# Altium PCB sar19-main-board.PcbDoc
Units mm, origin at the board's own origin, x right, y up, seen from the top; angles counter-clockwise.
Board outline 26 x 32 mm, 2 copper layers (Top Layer, Bottom Layer), stack 1.571 mm thick; 56 components, 42 nets, 228 pads, 110 vias.
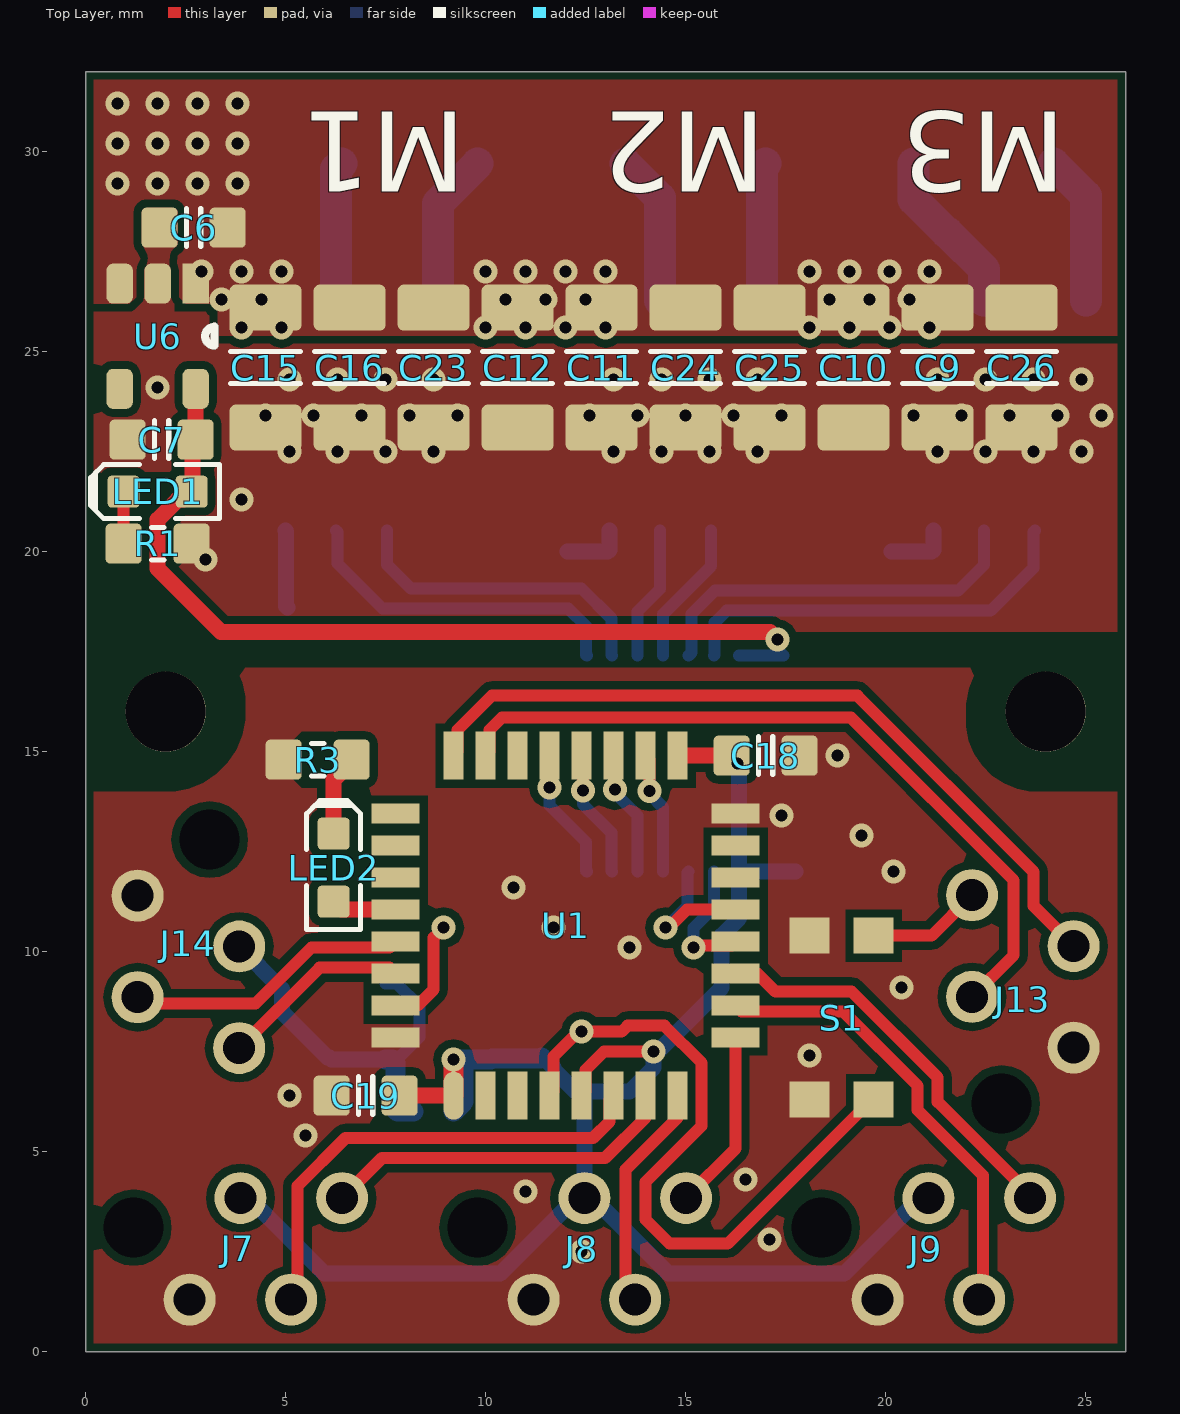
[diagram p0: Top Layer view]
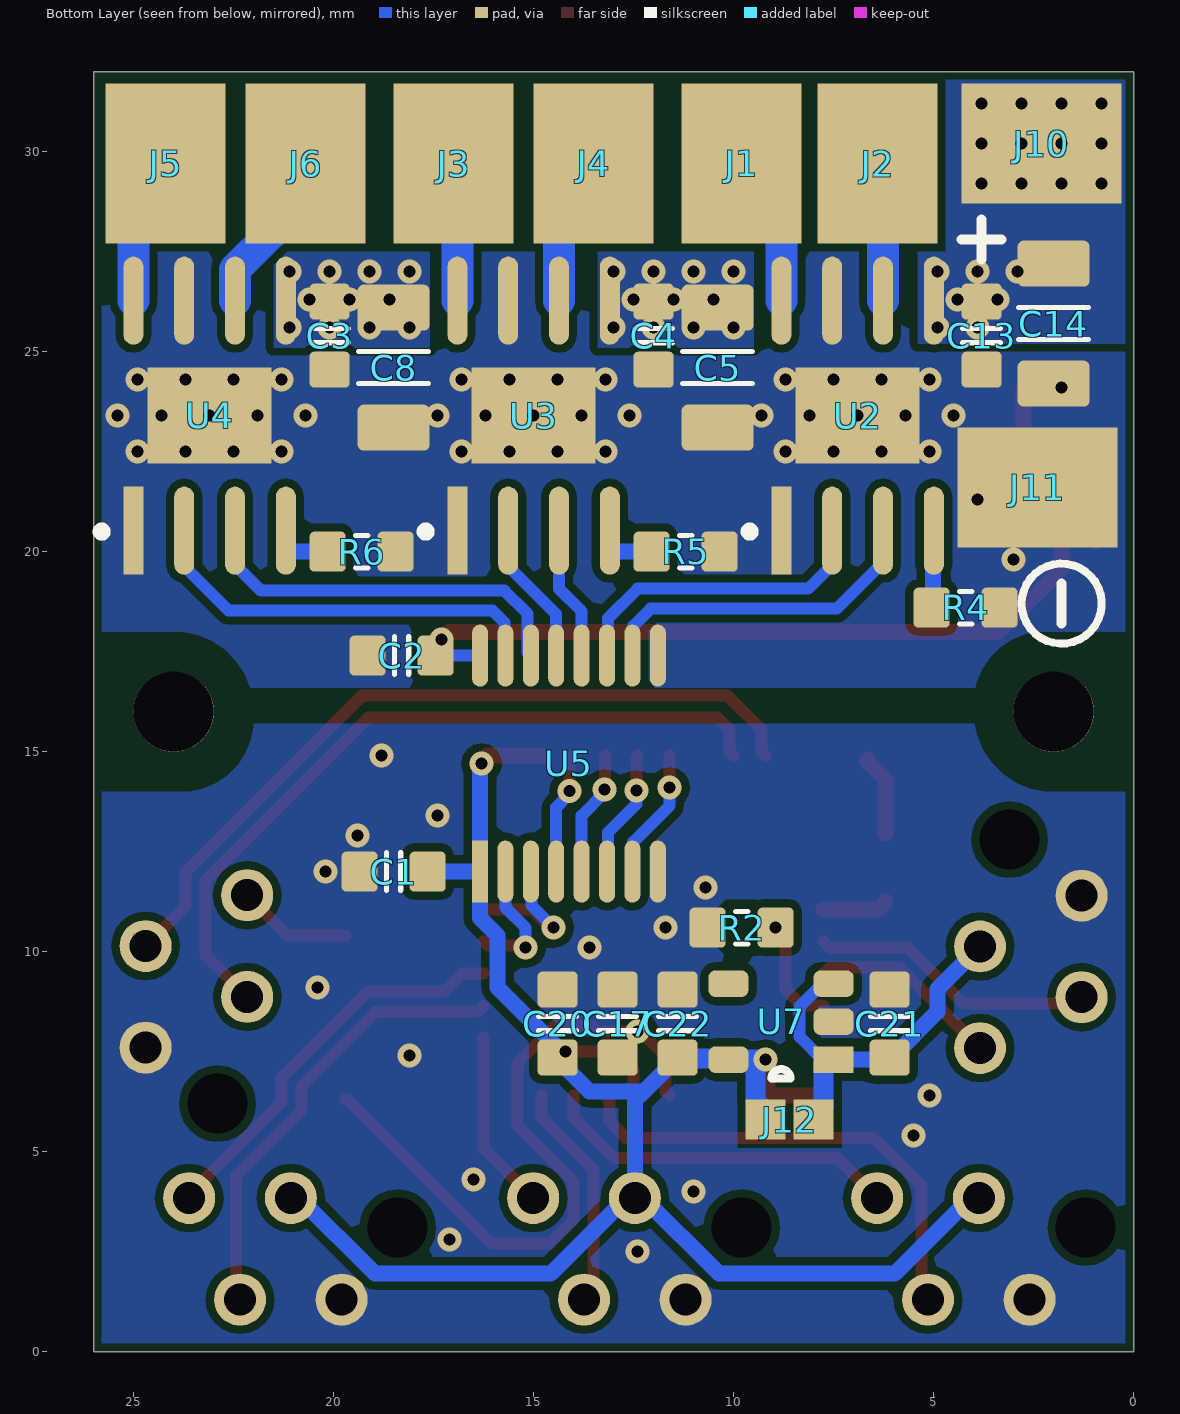
[diagram p1: Bottom Layer view, seen from below]

## Layer stack, top to bottom
Top Solder: solder mask 0.0102, Solder Resist, Dk 3.5
Top Layer: signal copper 0.0356
Dielectric 1: dielectric 1.5, FR-4, Dk 4.8
Bottom Layer: signal copper 0.0356
Bottom Solder: solder mask 0.0102, Solder Resist, Dk 3.5

## Board outline
0,0 26,0 26,32 0,32

## Design rules (kind name [scope] priority, off if disabled: settings)
BoardOutlineClearance [All] p1: gap=0.2 ignorepadtopadclearanceinfootprint=FALSE except(0: Arc-SplitContinuation Track-SplitContinuation SMDPad-SplitContinuation THPad-SplitContinuation Via-SplitContinuation Fill-SplitContinuation Poly-SplitContinuation Region-SplitContinuation Text-SplitContinuation)
Clearance [All] p1: gap=0.2 ignorepadtopadclearanceinfootprint=FALSE except(0: Arc-Hole Track-Hole SMDPad-Hole THPad-Hole Via-Hole Fill-Hole Poly-Hole Region-Hole Text-Hole)
ComponentClearance [All] p1: gap=0.2 collisioncheckmode=3 verticalgap=0.2 showdistances=FALSE
HoleSize [All] p1: absolutevalues=TRUE maxlimit=3 minlimit=0.3 maxpercent=80.000 minpercent=20.000
HoleToHoleClearance [All] p1: gap=0.2 allowstackedmicrovias=TRUE
PolygonConnect [All] p1: connectstyle=Direct reliefconductorwidth=0.254 reliefentries=4 polygonreliefangle="90 Angle" airgapwidth=0.2
RoomDefinition sar19-main-board [InComponentClass('sar19-main-board')] p1: confinementstyle=ConfineIn formatcopy=TRUE lockcomponents=FALSE outline -8.65,-10.5 95.1,-10.5 95.1,84 -8.65,84
RoutingVias [All] p1: holewidth=0.3 width=0.6 viastyle="Through Hole" minholewidth=0.3 minwidth=0.6 maxholewidth=3 maxwidth=5
SilkToSilkClearance [All] p1: silktosilkclearance=0.2
SilkToSolderMaskClearance [IsPad] p1: minsilkscreentomaskgap=0.2 clearancetoexposedcopper=TRUE
SolderMaskExpansion SolderMaskExpansionTentedVia [IsVia] p1: expansion=-5
SolderMaskExpansion [All] p2: expansion=0.1
Width [All] p1: maxlimit=10 minlimit=0.2 preferedwidth=0.3
25 further rules are at their usual default settings.

## Components (designator, comment, footprint, x,y, rotation, side; value= is the part's Value field where it differs from the comment)
C1 "approved sub OK" CAPC1608X90N 18.5,12 r0 bottom value=100n
C2 "approved sub OK" CAPC1608X90N 18.3,17.4 r0 bottom value=100n
C3 "approved sub OK" CAPC1608X90N 20.1,25.4 r270 bottom value=100n
C4 "approved sub OK" CAPC1608X90N 12,25.4 r270 bottom value=100n
C5 "10u" CAPC3216X180N 10.4,24.6 r270 bottom value=10µ
C6 "approved sub OK" CAPC1608X90N 2.7,28.1 r180 top value=1u
C7 "approved sub OK" CAPC1608X90N 1.9,22.8 r180 top value=1u
C8 "10u" CAPC3216X180N 18.5,24.6 r270 bottom value=10µ
C9 "10u" CAPC3216X180N 21.3,24.6 r270 top value=10µ
C10 "10u" CAPC3216X180N 19.2,24.6 r270 top value=10µ
C11 "10u" CAPC3216X180N 12.9,24.6 r270 top value=10µ
C12 "10u" CAPC3216X180N 10.8,24.6 r270 top value=10µ
C13 "approved sub OK" CAPC1608X90N 3.8,25.4 r270 bottom value=100n
C14 "10u" CAPC3216X180N 2,25.7 r270 bottom value=10µ
C15 "10u" CAPC3216X180N 4.5,24.6 r270 top value=10µ
C16 "10u" CAPC3216X180N 6.6,24.6 r270 top value=10µ
C17 "approved sub OK" CAPC1608X90N 12.9,8.2 r270 bottom value=100n
C18 "approved sub OK" CAPC1608X90N 17,14.9 r0 top value=100n
C19 "approved sub OK" CAPC1608X90N 7,6.4 r180 top value=100n
C20 "approved sub OK" CAPC1608X90N 14.4,8.2 r90 bottom value=100n
C21 "approved sub OK" CAPC1608X90N 6.1,8.2 r90 bottom value=1u
C22 "approved sub OK" CAPC1608X90N 11.4,8.2 r90 bottom value=1u
C23 "10u" CAPC3216X180N 8.7,24.6 r270 top value=10µ
C24 "10u" CAPC3216X180N 15,24.6 r270 top value=10µ
C25 "10u" CAPC3216X180N 17.1,24.6 r270 top value=10µ
C26 "10u" CAPC3216X180N 23.4,24.6 r270 top value=10µ
J1 "M1_2" POWER-PAD-4x3 9.8,29.7 r270 bottom
J2 "M1_1" POWER-PAD-4x3 6.4,29.7 r270 bottom
J3 "M2_2" POWER-PAD-4x3 17,29.7 r270 bottom
J4 "M2_1" POWER-PAD-4x3 13.5,29.7 r270 bottom
J5 "M3_2" POWER-PAD-4x3 24.2,29.7 r270 bottom
J6 "M3_1" POWER-PAD-4x3 20.7,29.7 r270 bottom
J7 "ENC1" MICRO-MATCH-FOB-04 2.6,1.3 r180 top
J8 "ENC2" MICRO-MATCH-FOB-04 11.2,1.3 r180 top
J9 "ENC3" MICRO-MATCH-FOB-04 19.8,1.3 r180 top
J10 "BAT+" POWER-PAD-4x3 2.3,30.2 r180 bottom
J11 "BAT-" POWER-PAD-4x3 2.4,21.6 r180 bottom
J12 "JUMPER" JUMPER-SMD-1010 8.6,5.8 r180 bottom
J13 "SWD" MICRO-MATCH-FOB-04 24.7,7.6 r270 top
J14 "UART" MICRO-MATCH-FOB-04 1.3,11.4 r90 top
LED1 "White" LED-0603-GREEN 1.8,21.5 r180 top
LED2 "White" LED-0603-GREEN 6.2,12.1 r90 top
R1 "1k" RESC1608X55N#1 1.8,20.2 r0 top value=1K
R2 "10k" RESC1608X55N#1 9.8,10.6 r0 bottom value=10K
R3 "1k" RESC1608X55N#1 5.8,14.8 r180 top value=1K
R4 "30k" RESC1608X55N#2 4.2,18.6 r180 bottom value=1K
R5 "30k" RESC1608X55N#2 11.2,20 r180 bottom value=1K
R6 "30k" RESC1608X55N#2 19.3,20 r180 bottom value=1K
S1 "PUSHBUTTON" KMR421NGLFS 18.9,8.35 r270 top
U1 "STM32F303K8T6" LQFP32 9.2,6.4 r90 top
U2 "DRV8871" HSOP8 6.9,23.4 r90 bottom
U3 "DRV8871" HSOP8 15,23.4 r90 bottom
U4 "DRV8871" HSOP8 23.1,23.4 r90 bottom
U5 "SI8660" QSOP16 16.34,12 r90 bottom
U6 "MIC5225" SOT23-5 2.75,26.7 r270 top
U7 "MIC5504-3.3" SOT23-5 7.5,7.3 r0 bottom

## Footprints (in the part's own frame and the unit in brackets; to place one, negate y for a bottom-side part, rotate by r counter-clockwise, add the part's x,y. Pads: shape width x height; smd on the part's side, far side on the other; paste and mask are expansions set on the pad)
CAPC1608X90N [mm] "Chip Capacitor, Body 1.6x0.8mm, EIA 0603, IPC Medium Density"
  round 0.254 on Mech15: 0(0,0)
  rrect25% 0.9x1 smd: 1(-0.85,0) 2(0.85,0)
  silkscreen extent -0.18,-0.48 0.18,0.48, body extent -0.85,-0.45 0.85,0.45, height 0.89
CAPC3216X180N [mm] "Chip Capacitor, Body 3.2x1.6mm, 1.8mm H, EIA 1206, IPC Medium Density"
  round 0.508 on Mech15: 0(0,0)
  rrect25% 1.15x1.8 smd: 1(-1.5,0) 2(1.5,0)
  silkscreen extent -0.4,-0.88 0.4,0.88, body extent -1.7,-0.9 1.7,0.9, height 1.8
HSOP8 [mm]
  rect 2.2x0.5 smd: 1(-2.875,1.905)
  oval 2.2x0.5 smd: 2(-2.875,0.635) 3(-2.875,-0.635) 4(-2.875,-1.905) 5(2.875,-1.905) 6(2.875,-0.635) 7(2.875,0.635) 8(2.875,1.905)
  rect 2.4x3.1 smd: 9(0,0)
  silkscreen extent -3,2.6 -2.8,2.8, body extent -3.01,-2.35 3.01,2.35, height 1.7
JUMPER-SMD-1010 [mm]
  rect 1x1 smd: 1(-0.6,0) 2(0.6,0)
KMR421NGLFS [mm]
  rect 0.9x1 smd: 1(-2.05,0.8) 1(2.05,0.8) 2(-2.05,-0.8) 2(2.05,-0.8)
  body extent -2.1,-1.4 2.1,1.4, height 2.5
LED-0603-GREEN [mm]
  round 0.254 on Mech15: 0(0,0)
  rrect25% 0.8x0.8 smd: A(-0.85,0) K(0.85,0)
  Top Layer pour cut-out: -0.5,0.5 0.5,0.5 0.5,-0.5 -0.5,-0.5
  silkscreen extent -1.55,-0.67 1.68,0.67, body extent -0.8,-0.4 0.8,0.4, height 0.75
LQFP32 [mm]
  oval 1.2x0.5 smd: 1(0,0)
  rect 1.2x0.5 smd: 2(0,-0.8) 3(0,-1.6) 4(0,-2.4) 5(0,-3.2) 6(0,-4) 7(0,-4.8) 8(0,-5.6) 17(8.5,-5.6) 18(8.5,-4.8) 19(8.5,-4) 20(8.5,-3.2) 21(8.5,-2.4) 22(8.5,-1.6) 23(8.5,-0.8) 24(8.5,0)
  rect 0.5x1.2 smd: 9(1.45,-7.05) 10(2.25,-7.05) 11(3.05,-7.05) 12(3.85,-7.05) 13(4.65,-7.05) 14(5.45,-7.05) 15(6.25,-7.05) 16(7.05,-7.05) 25(7.05,1.45) 26(6.25,1.45) 27(5.45,1.45) 28(4.65,1.45) 29(3.85,1.45) 30(3.05,1.45) 31(2.25,1.45) 32(1.45,1.45)
  body extent -0.32,-7.37 8.82,1.77, height 1.62
MICRO-MATCH-FOB-04 [mm]
  round 1.3 hole 0.8: 1(0,0) 2(-1.27,-2.54) 3(-2.54,0) 4(-3.81,-2.54)
  round 0 hole 1.5 unplated: drill(1.4,-1.8)
  body extent -5.41,-3.77 1.6,1.23, height 4
POWER-PAD-4x3 [mm]
  rect 4x3 smd: 1(0,0)
QSOP16 [mm]
  rect 1.55x0.4 smd: 1(0,0)
  oval 1.55x0.4 smd: 2(0,-0.635) 3(0,-1.27) 4(0,-1.905) 5(0,-2.54) 6(0,-3.175) 7(0,-3.81) 8(0,-4.445) 9(5.4,-4.445) 10(5.4,-3.81) 11(5.4,-3.175) 12(5.4,-2.54) 13(5.4,-1.905) 14(5.4,-1.27) 15(5.4,-0.635) 16(5.4,0)
  body extent -0.31,-4.72 5.76,0.28, height 1.88
RESC1608X55N#1 [mm] "Chip Resistor, Body 1.6x0.8mm, EIA 0603, IPC Medium Density"
  round 0.254 on Mech15: 0(0,0)
  rrect25% 0.9x1 smd: 1(-0.85,0) 2(0.85,0)
  Top Layer pour cut-out: -0.6,0.5 -0.4,0.7 0.4,0.7 0.6,0.5 0.6,-0.5 0.4,-0.7 -0.4,-0.7 -0.6,-0.5
  silkscreen extent -0.15,-0.41 0.15,0.41, body extent -0.87,-0.47 0.88,0.48, height 0.54
RESC1608X55N#2 [mm] "Chip Resistor, Body 1.6x0.8mm, EIA 0603, IPC Medium Density"
  round 0.254 on Mech15: 0(0,0)
  rrect25% 0.9x1 smd: 1(-0.85,0) 2(0.85,0)
  silkscreen extent -0.15,-0.41 0.15,0.41, body extent -0.87,-0.47 0.88,0.48, height 0.54
SOT23-5 [mm]
  rect 1x0.66 smd: 1(0,0)
  rrect50% 1x0.66 smd: 2(0,-0.95) 3(0,-1.9) 4(2.63,-1.9) 5(2.63,0)
  silkscreen extent 1.08,0.24 1.55,0.48, body extent 0.1,-2.47 2.6,0.53, height 1.11

## Part data
C1 C2 C3 C4 C6 C7 C13 C17 C18 C19 C20 C21 C22: library part CAPC_100n_0603_X7R_50V_10%, "Capacitor SMD Cer 100nF 10% 50V X7R 0603", Manufacturer 1="AVX Corporation", Manufacturer 2="TDK Corporation", Manufacturer Part Number 1=06035C104KAT2A, Manufacturer Part Number 2=C1608X7R1H104K, Package / Case="0603 (1608 Metric)", Ratings="50V; X7R", Supplier Part Number 1=478-5052-1-ND, Tolerance=±10%, ComponentLink1Description=http://www.avx.com/docs/Catalogs/cx7r.pdf, ComponentLink1URL=http://www.avx.com/docs/Catalogs/cx7r.pdf, ComponentLink2Description=http://product.tdk.com/capacitor/mlcc/en/documents/mlcc_commercial_general_en.pdf, ComponentLink2URL=http://product.tdk.com/capacitor/mlcc/en/documents/mlcc_commercial_general_en.pdf, Material=ceramic, SCDType=spec, Supplier 1=Digi-Key, Supplier 2=Digi-Key, Supplier Part Number 2=445-1314-1-ND
C5 C8 C9 C10 C11 C12 C14 C15 C16 C23 C24 C25 C26: library part CAPC_10u_1206_16V, "Capacitor SMD Cer 10uF 10% 16V X7R 1206", Manufacturer 1=Kemet, Manufacturer Part Number 1=C1206C106K4RACTU, Package / Case="1206 (3216 metric)", Ratings="16V; X7R", Supplier Part Number 1=399-3525-1-ND, Tolerance=±10%, Material=ceramic, SCDType=spec, Supplier 1=Digi-Key
J1 J2 J3 J4 J5 J6 J10 J11: library part HEADER-1
J7 J8 J9 J13 J14: library part HEADER-4
J12: library part JUMPER-SMD
LED1 LED2: library part LED_SMD_Green_0603_570nm, "LED 0603 SMD Green 570nm 50mcd 20mA", Color=Green, Current - Test=20mA, Manufacturer 1="Kingbright Company LLC", Manufacturer Part Number 1=APT1608CGCK, Package / Case="0603 (1608 metric)", Ratings="20mcd min; 50 mcd typ; 570 nm", Supplier Part Number 1=754-1116-1-ND, Voltage - Forward (Vf) @ 10mA=2.0V, Voltage - Forward (Vf) Typ=2.1V, ComponentLink1Description=http://www.us.kingbright.com/images/catalog/SPEC/APT1608CGCK.pdf, ComponentLink1URL=http://www.us.kingbright.com/images/catalog/SPEC/APT1608CGCK.pdf, Lens Style/Size="Rectangle with Flat Top, 1.1mm x 0.8mm", Lens Type=Clear, Material=AlGaInP, RoHS 1="RoHS Compliant", SCDType=source, Supplier 1=Digi-Key, Viewing Angle=120°, Wavelength - Dominant=570nm, Wavelength - Peak=574nm
R1 R3 R4 R5 R6: library part RES_1K_0603_1%, "Resistor SMD chip 1k Ohm 0.1W 1% 0603", Manufacturer 1=Yageo, Manufacturer Part Number 1=RC0603FR-071KL, Package / Case="0603 (1608 Metric)", Ratings=1/10W, Supplier Part Number 1=311-1.00KHRCT-ND, Tolerance=±1%, SCDType=spec, Supplier 1=Digi-Key
R2: library part RES_10K_0603_5%, "Resistor SMD chip 10k Ohm 0.1W 5% 0603", Manufacturer 1=Yageo, Manufacturer 2="Vishay Dale", Manufacturer Part Number 1=RC0603JR-0710KL, Manufacturer Part Number 2=CRCW060310K0JNEA, Package / Case="0603 (1608 metric)", Ratings="1/10 W", Supplier Part Number 1=311-10KGRCT-ND, Tolerance=±5%, ComponentLink1Description=http://www.yageo.com/documents/recent/PYu-RC0603_51_RoHS_L_4.pdf, ComponentLink1URL=http://www.yageo.com/documents/recent/PYu-RC0603_51_RoHS_L_4.pdf, ComponentLink2Description=http://www.vishay.com/doc?20035, ComponentLink2URL=http://www.vishay.com/doc?20035, Material="Thick Film", SCDType=spec, Supplier 1=Digi-Key, Supplier 2=Digi-Key, Supplier Part Number 2=541-10KGCT-ND
U6 U7: library part LDO-SOT23-5

## Free pads (board coordinates)
  round 2 hole 2 unplated: hole(2,16) hole(24,16)

## Via types
v1: diameter 0.6, hole 0.3, Top Layer to Bottom Layer, 110 vias

## Nets (pads, with @x,y where several pads share a name; then routed paths per layer and width w, separated by ;. In a path a pad name is that pad's centre, name@x,y a point inside that pad or via, vN(x,y) a via of type N, cw(c..) or ccw(c..) an arc to the next point about the centre after c; other vN are vias at no path point)
+3.3: C1.1 C18.1 C19.1 C20.1 C22.1 J7.2 J8.2 J9.2 J12.1 U1.1 U1.5 U1.17 U5.1 U7.5 | length 46.3
  Top Layer w0.3: U1.5 12.5,6.5 12.5,7.045 12.955,7.5 v1(14.2,7.5)
  Top Layer w0.4: C19.1@7.85,6.45 C19.1 U1.1 ; U1.17 C18.1
  Top Layer w0.5: U1.1 v1(9.2,7.3)
  Bottom Layer w0.4: J7.2 4.085,3.84 5.975,1.95 10.365,1.95 12.255,3.84 J8.2 ; C22.1 11.45,7.35 11.7,7.1 11.7,7.05 12.25,6.5 ; v1(16.3,14.7) 16.338,14.662 16.338,14.462 16.34,14.46 U5.1 ; C1.1@17.75,12 C1.1 U5.1 ; J9.2 20.855,3.84 18.965,1.95 14.575,1.95 12.685,3.84 J8.2 ; 12.25,6.5 12.47,6.28 J8.2 ; 12.25,6.5 13.6,6.5 14.2,7.1 v1(14.2,7.5) 14.3,7.5 15.9,9.1 15.9,10.4 16.34,10.84 U5.1
  Bottom Layer w0.5: J12.1@9.2,6 9.45,6.25 v1@9.45,7.3 ; v1(9.2,7.3) v1@9.45,7.3 ; C22.1 11.375,7.325 10.155,7.325 U7.5 v1@9.45,7.3
+5V_M: C2.1 C7.1 LED1.A U5.16 U6.5 | length 22.7
  Top Layer w0.4: U6.5 C7.1 2.674,22.724 2.674,21.524 LED1.A 2.45,21.3 2.3,21.3 1.8,20.8 1.8,19.577 3.382,17.995 17.105,17.995 v1(17.3,17.8)
  Bottom Layer w0.3: U5.16 C2.1 17.3,17.55 C2.1@17.3,17.7
+16: C3.1 C4.1 C5.1 C6.1 C8.1 C9.1 C10.1 C11.1 C12.1 C13.1 C14.1 C15.1 C16.1 C23.1 C24.1 C25.1 C26.1 J10.1 U2.5 U3.5 U4.5 U6.1 U6.3
  other v1: 3.9,25.6 4.9,25.6 10,25.6 11,25.6 12,25.6 13,25.6 18.1,25.6 19.1,25.6 20.1,25.6 21.1,25.6 3.4,26.3 4.4,26.3 10.5,26.3 11.5,26.3 12.5,26.3 18.6,26.3 19.6,26.3 20.6,26.3 2.9,27 3.9,27 4.9,27 10,27 11,27 12,27 13,27 18.1,27 19.1,27 20.1,27 21.1,27 0.8,29.2 1.8,29.2 2.8,29.2 3.8,29.2 0.8,30.2 1.8,30.2 2.8,30.2 3.8,30.2 0.8,31.2 1.8,31.2 2.8,31.2 3.8,31.2
ENC1A: J7.3 U1.6 | length 12.1
  Top Layer w0.3: J7.3 5.3,1.46 5.3,4.144 6.496,5.34 12.685,5.34 13.1,5.755 13.1,6.3 U1.6
ENC1B: J7.4 U1.7 | length 9
  Top Layer w0.3: J7.4 7.41,4.84 12.985,4.84 14,5.855 U1.7
ENC2A: J8.3 U1.8 | length 5.7
  Top Layer w0.3: J8.3 13.5,1.54 13.5,4.555 14.8,5.855 U1.8
ENC2B: J8.4 U1.9 | length 4.5
  Top Layer w0.3: J8.4 16.25,5.08 U1.9
ENC3A: J9.3 U1.10 | length 11.4
  Top Layer w0.3: U1.10 16.4,8.5 18.945,8.5 20.8,6.645 20.8,6.037 22.437,4.4 22.437,1.397 J9.3
ENC3B: J9.4 U1.11 | length 10.1
  Top Layer w0.3: U1.11 16.795,9.45 17.245,9 19.152,9 21.3,6.852 21.3,6.244 23.61,3.934 J9.4
GND: C1.2 C17.1 C18.2 C19.2 C20.2 C21.2 C22.2 J7.1 J8.1 J9.1 J13.1 J14.1 R2.2 R3.2 S1.2 U1.16 U1.32 U5.8 U7.2
  other v1: 12.4,2.5 17.1,2.8 11,4 16.5,4.3 5.5,5.4 5.1,6.4 18.1,7.4 20.4,9.1 13.6,10.1 11.7,10.6 10.7,11.6 20.2,12 19.4,12.9 17.4,13.4 18.8,14.9
LED: LED2.A U1.28 | length 1.6
  Top Layer w0.4: LED2.A 6.4,11.05 U1.28
M1_1: J2.1 U2.6 | length 3.5
  Bottom Layer w0.8: U2.6 6.265,29.565 J2.1
M1_2: J1.1 U2.8 | length 3.8
  Bottom Layer w0.8: U2.8 8.805,28.705 J1.1
M1_IN1: U2.3 U5.10 | length 8.4
  Bottom Layer w0.3: U2.3 6.3,20.49 6.3,19.7 7.425,18.575 12.073,18.575 12.511,18.137 12.511,17.419 U5.10
M1_IN2: U2.2 U5.11 | length 8
  Bottom Layer w0.3: U2.2 7.535,19.675 8.135,19.075 12.4,19.075 13.146,18.329 13.146,17.419 U5.11
M2_1: J4.1 U3.6 | length 3.8
  Bottom Layer w0.8: J4.1 14.365,28.835 U3.6
M2_2: J3.1 U3.8 | length 3.5
  Bottom Layer w0.8: U3.8 16.905,29.605 J3.1
M2_IN1: U3.3 U5.12 | length 3.4
  Bottom Layer w0.3: U5.12 13.8,18.507 14.365,19.072 U3.3
M2_IN2: U3.2 U5.13 | length 3.6
  Bottom Layer w0.3: U5.13 14.435,18.435 15.635,19.635 U3.2
M3_1: J6.1 U4.6 | length 4.2
  Bottom Layer w0.8: J6.1 20.7,28.8 21.525,27.975 21.547,27.975 22.465,27.057 U4.6
M3_2: J5.1 U4.8 | length 3.8
  Bottom Layer w0.8: J5.1 25.005,28.895 U4.8
M3_IN1: U4.3 U5.14 | length 9.8
  Bottom Layer w0.3: U5.14 15.15,17.48 15.15,18.443 15.732,19.025 21.815,19.025 22.465,19.675 U4.3
M3_IN2: U4.2 U5.15 | length 10.3
  Bottom Layer w0.3: U5.15 15.724,17.419 15.724,18.224 16.025,18.525 22.625,18.525 23.697,19.597 23.697,20.487 U4.2
NetLED1_K: LED1.K R1.1 | length 1.3
  Top Layer w0.3: R1.1 LED1.K
NetLED2_K: LED2.K R3.1 | length 2
  Top Layer w0.4: LED2.K 6.2,14.3 6.65,14.75 R3.1
NetR2_1: R2.1 U1.31 | length 2.8
  Top Layer w0.3: U1.31 8.295,8.65 8.7,9.055 8.7,10.35 v1(8.95,10.6)
NetR4_1: R4.1 U2.4 | length 1.9
  Bottom Layer w0.4: U2.4 5.014,20.506 5.014,18.636 R4.1
NetR5_1: R5.1 U3.4 | length 1.5
  Bottom Layer w0.4: R5.1 13.049,20 13.095,20.046 U3.4
NetR6_1: R6.1 U4.4 | length 1.5
  Bottom Layer w0.4: R6.1 21.149,20 21.195,20.046 U4.4
NRST: C17.2 J13.4 S1.1 U1.4 | length 20.2
  Top Layer w0.3: U1.4 11.7,6.5 11.7,7.381 12.319,8 v1(12.4,8) 13.4,8 13.55,8.15 14.469,8.15 15.4,7.219 15.4,5.644 14,4.244 14,3.3 14.6,2.7 16.05,2.7 19.65,6.3 S1.1@19.7,6.3 ; S1.1@19.7,10.4 21.15,10.4 J13.4
PGND: C2.2 C3.2 C4.2 C5.2 C6.2 C7.2 C8.2 C9.2 C10.2 C11.2 C12.2 C13.2 C14.2 C15.2 C16.2 C23.2 C24.2 C25.2 C26.2 J11.1 R1.2 R4.2 R5.2 R6.2 U2.1 U2.7 U2.9 U3.1 U3.7 U3.9 U4.1 U4.7 U4.9 U5.9 U6.2
  other v1: 3,19.8 3.9,21.3 5.1,22.5 6.3,22.5 7.5,22.5 8.7,22.5 13.2,22.5 14.4,22.5 15.6,22.5 16.8,22.5 21.3,22.5 22.5,22.5 23.7,22.5 24.9,22.5 4.5,23.4 5.7,23.4 6.9,23.4 8.1,23.4 9.3,23.4 12.6,23.4 13.8,23.4 15,23.4 16.2,23.4 17.4,23.4 20.7,23.4 21.9,23.4 23.1,23.4 24.3,23.4 25.4,23.4 1.8,24.1 5.1,24.3 6.3,24.3 7.5,24.3 8.7,24.3 13.2,24.3 14.4,24.3 15.6,24.3 16.8,24.3 21.3,24.3 22.5,24.3 23.7,24.3 24.9,24.3
PWM1_1: U1.21 U5.7 | length 3.3
  Top Layer w0.3: v1(11.6,14.1) U1.21
  Bottom Layer w0.3: v1(11.6,14.1) 11.6,13.648 12.511,12.737 12.511,12.019 U5.7
PWM1_2: U1.20 U5.6 | length 3.2
  Top Layer w0.3: U1.20 12.431,14.869 v1@12.431,14.131
  Bottom Layer w0.3: v1@12.431,14.131 12.431,13.688 13.146,12.973 13.146,12.019 U5.6
  other v1: 12.431,14.031
PWM2_1: U1.19 U5.5 | length 3.1
  Top Layer w0.3: U1.19 13.216,14.884 13.216,14.166 v1@13.231,14.15
  Bottom Layer w0.3: v1@13.231,14.15 13.231,13.969 13.8,13.4 U5.5
  other v1: 13.231,14.05
PWM2_2: U1.18 U5.4 | length 3.1
  Top Layer w0.3: U1.18 14.1,14.8 v1@14.1,13.919
  Bottom Layer w0.3: v1@14.1,13.919 14.119,13.919 14.435,13.603 U5.4
  other v1: 14.1,14.019
PWM3_1: U1.13 U5.3 | length 3.6
  Top Layer w0.3: v1(14.5,10.6) 14.581,10.6 15.031,11.05 U1.13
  Bottom Layer w0.3: v1(14.5,10.6) 15.051,11.151 15.051,11.981 U5.3
PWM3_2: U1.12 U5.2 | length 3.2
  Top Layer w0.3: v1(15.2,10.1) 15.257,10.157 16.157,10.157 U1.12
  Bottom Layer w0.3: v1(15.2,10.1) 15.2,10.593 15.705,11.098 U5.2
RX: J14.4 U1.30 | length 4.8
  Top Layer w0.3: J14.4 5.85,9.6 7.6,9.6 U1.30
SWCLK: J13.3 U1.24 | length 19.5
  Top Layer w0.3: U1.24 9.3,15 9.3,15.545 10.155,16.4 19.291,16.4 23.7,11.991 23.7,11.14 J13.3
SWDIO: J13.2 U1.23 | length 18.9
  Top Layer w0.3: U1.23 10.1,15 10.1,15.545 10.405,15.85 19.134,15.85 23.2,11.784 23.2,9.91 J13.2
TX: J14.3 U1.29 | length 7.2
  Top Layer w0.3: J14.3 1.46,8.7 4.243,8.7 5.643,10.1 7.6,10.1 U1.29
VDD: C21.1 J12.2 J14.2 U7.1 U7.3 | length 9.9
  Bottom Layer w0.3: U7.3 7.778,9.2 8.35,8.628 8.35,7.872 7.778,7.3 U7.1@7.67,7.3
  Bottom Layer w0.4: J14.2 4.906,9.064 4.906,8.494 6.05,7.35 C21.1 6.15,7.3 U7.1
  Bottom Layer w0.5: U7.1 7.67,7.3 7.75,7.22 7.75,6.05 7.8,6 J12.2@8.2,6
pads on no net: C1.0 C2.0 C3.0 C4.0 C5.0 C6.0 C7.0 C8.0 C9.0 C10.0 C11.0 C12.0 C13.0 C14.0 C15.0 C16.0 C17.0 C18.0 C19.0 C20.0 C21.0 C22.0 C23.0 C24.0 C25.0 C26.0 J7.drill J8.drill J9.drill J13.drill J14.drill LED1.0 LED2.0 R1.0 R2.0 R3.0 R4.0 R5.0 R6.0 U1.2 U1.3 U1.14 U1.15 U1.22 U1.25 U1.26 U1.27 U6.4 U7.4

## Polygon pours and split planes (outlines as drawn)
PGND on Bottom Layer "Bottom Layer-PGND" (solid, remove dead copper, pour order 30): 0,32 0,16.6 26,16.6 26,32 0,32
GND on Bottom Layer "Bottom Layer-GND" (solid, remove dead copper, pour order 36): 26,0 26,15.7 0,15.7 0,0
+16 on Bottom Layer "Bottom Layer-+16" (solid, remove dead copper, pour order 18): 0,32 0,25.2 5.4,25.2 5.4,32
GND on Bottom Layer "Bottom Layer-GND 1" (solid, remove dead copper, pour order 34): 0,0
+16 on Bottom Layer "Bottom Layer-+16 1" (solid, remove dead copper, pour order 26): 21.5,25.1 21.5,27.5 17.6,27.5 17.6,25.1
+16 on Bottom Layer "Bottom Layer-+16 2" (solid, remove dead copper, pour order 24): 13.4,25.1 9.5,25.1 9.5,27.5 13.4,27.5
+16 on Bottom Layer "Bottom Layer-+16 3" (solid, remove dead copper, pour order 20): -1.8,28.6
no net on Bottom Layer "Bottom Layer-No Net" (solid, pour order 16): 0,32
PGND on Top Layer "Top Layer-PGND" (solid, remove dead copper, pour order 28): 0,32 0,18 26,18 26,32
GND on Top Layer "Top Layer-GND" (solid, remove dead copper, pour order 32): 0,0 0,17.1 26,17.1 26,0
+16 on Top Layer "Top Layer-+16" (solid, remove dead copper, pour order 22): 0,32 0,26.2 3.3,26.2 3.3,25.4 26,25.4 26,32

## Other copper
Top Layer:
  pour cut-out: 0,18 0,14 2,14 ccw(c2,16) 4,16 4,16.197 ccw(c2.197,16.197) 2.197,18
  pour cut-out: 26,14 26,18 24,18 ccw(c24,16) 22,16 22,15.803 ccw(c23.803,15.803) 23.803,14
Bottom Layer:
  pour cut-out: 26,14 26,18 24,18 ccw(c24,16) 22,16 22,15.803 ccw(c23.803,15.803) 23.803,14
  pour cut-out: 0,18 0,14 2,14 ccw(c2,16) 4,16 4,16.197 ccw(c2.197,16.197) 2.197,18
  pour cut-out: 0,14
  pour cut-out: 2,16

## Silkscreen, mask and mechanical layers (free items; w line width, h text height)
Top Overlay:
  text "M1" at 9.5,31 h2 r180
  text "M2" at 17,31 h2 r180
  text "M3" at 24.5,31 h2 r180
Bottom Overlay:
  circle w0.2: c1.8,18.7 r1
  lines w0.254: 1.8,18.2 1.8,19.2 ; 3.3,27.8 4.3,27.8 ; 3.8,27.3 3.8,28.3
Top Solder:
  rectangle: 3.5,22.4 25.8,23.8
  rectangle: 3.5,25.4 25.8,26.8
Bottom Solder:
  rectangle: 17.5,25.4 21.5,27.3
  rectangle: 9.5,25.4 13.4,27.3
Mechanical 1:
  lines w0.1: 0,0 26,0 26,32 0,32 ; 0,0 0,32 ; 0,0 0,32